# EAGLE board scoreboard (EAGLE 7.5.0)
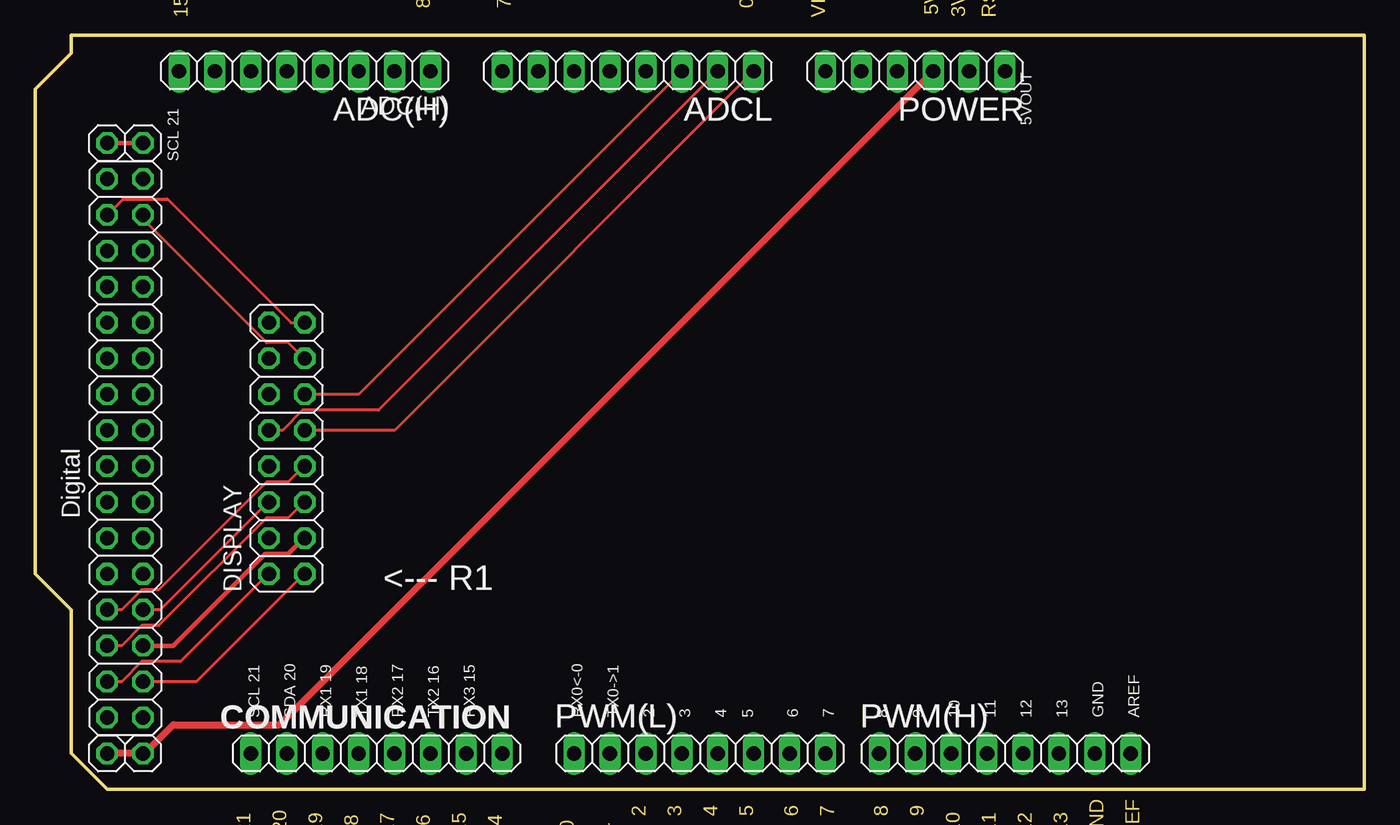
[diagram p0: board, top side]
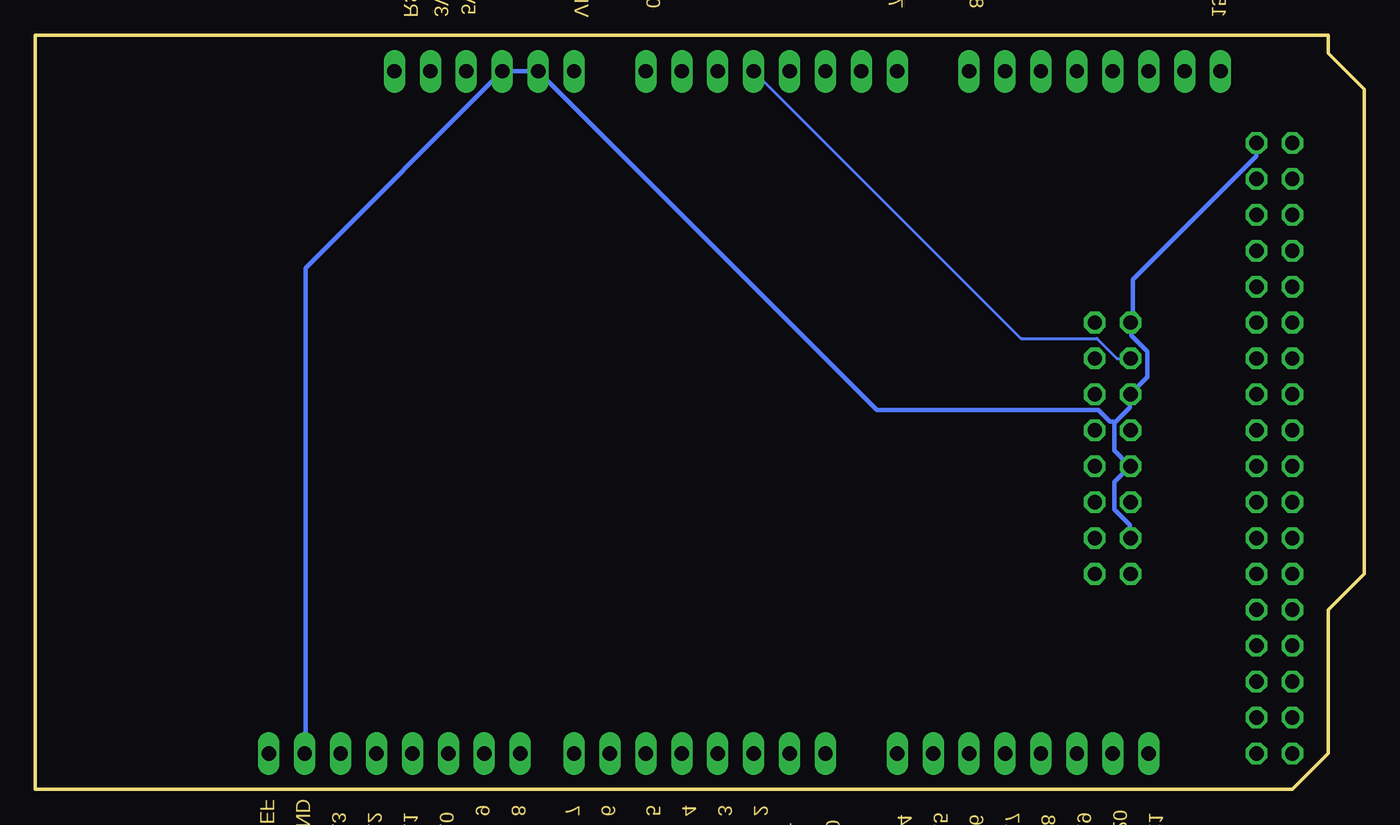
[diagram p1: board, bottom side, seen from below]

Size 93.98 x 53.34 mm. Coordinates in mm from the lower left corner, seen from the top.
Outline: 93.98,0 5.08,0 2.54,2.54 2.54,12.7 0,15.24 0,49.53 2.54,52.07 2.54,53.34 93.98,53.34 93.98,0
Copper layers (1*16): Top 0.0356mm / dielectric 1.5011mm / Bottom 0.0356mm
Design rules "oshpark-2layer": minimum track width 6mil, minimum drill 13mil, track to track 6mil, track to pad 6mil, pad to pad 6mil, via to via 6mil, smd to smd 6mil, copper to edge 15mil, drill to drill 6mil, minimum pad ring 7mil, minimum via ring 7mil, stop-mask expansion 2.5mil, vias tented up to drill 0mil, thermal gap 10mil
Net classes: 0 default: width 0.203 mm, drill 0.406 mm, clearance 0.203 mm; 1 power: width 0.61 mm, drill 0.711 mm, clearance 0.203 mm; 2 gnd: width 0.305 mm, drill 0.711 mm, clearance 0.203 mm; 3 usbvcc: width 0.508 mm, drill 0.711 mm, clearance 0.203 mm

## Footprints (pad centres in the part's own frame; a part is rotated, then mirrored left to right if it is on the bottom)
1X08 = drill 1.016 long: 1 -8.89,0; 2 -6.35,0; 3 -3.81,0; 4 -1.27,0; 5 1.27,0; 6 3.81,0; 7 6.35,0; 8 8.89,0
2X08 = drill 1.016 octagon: 1 -8.89,-1.27; 2 -8.89,1.27; 3 -6.35,-1.27; 4 -6.35,1.27; 5 -3.81,-1.27; 6 -3.81,1.27; 7 -1.27,-1.27; 8 -1.27,1.27; 9 1.27,-1.27; 10 1.27,1.27; 11 3.81,-1.27; 12 3.81,1.27; 13 6.35,-1.27; 14 6.35,1.27; 15 8.89,-1.27; 16 8.89,1.27
1X01 = drill 1.016 octagon: 1 0,0
1X06 = drill 1.016 long: 1 -6.35,0; 2 -3.81,0; 3 -1.27,0; 4 1.27,0; 5 3.81,0; 6 6.35,0

## Placement (x,y rotation side)
ADC(H)  [1X08]  19.05,50.8 180 top
ADCL  [1X08]  41.91,50.8 180 top
COMMUNICATION  [1X08]  24.13,2.54 0 top
DISPLAY  [2X08]  17.78,24.13 90 top
JP1  Digital  [2X08]  6.35,13.97 270 top
JP2  Digital  [2X08]  6.35,34.29 270 top
JP3  [1X01]  7.62,2.54 180 top
JP4  [1X01]  5.08,2.54 180 top
JP5  [1X01]  7.62,45.72 180 top
JP6  [1X01]  5.08,45.72 180 top
POWER  [1X06]  62.23,50.8 180 top
PWM(H)  [1X08]  68.58,2.54 0 top
PWM(L)  [1X08]  46.99,2.54 0 top

## Library data of the parts
ADC(H) ADCL COMMUNICATION DISPLAY JP1-JP6 POWER PWM(H) PWM(L) = pinhead

## Nets
+3V3 [power]: POWER.2
+5V [usbvcc]: JP3.1 JP4.1 POWER.3
ADC0: ADCL.1 DISPLAY.9
ADC1: ADCL.2 DISPLAY.10
ADC2: ADCL.3 DISPLAY.11
ADC3: ADCL.4 DISPLAY.14
ADC4: ADCL.5
ADC5: ADCL.6
ADC6: ADCL.7
ADC7: ADCL.8
ADC8: ADC(H).1
ADC9: ADC(H).2
ADC10: ADC(H).3
ADC11: ADC(H).4
ADC12: ADC(H).5
ADC13: ADC(H).6
ADC14: ADC(H).7
ADC15: ADC(H).8
AREF: PWM(H).8
DIG22: JP1.16
DIG23: JP1.15
DIG24: DISPLAY.1 JP1.14
DIG25: DISPLAY.2 JP1.13
DIG26 [gnd]: DISPLAY.3 JP1.12
DIG27: DISPLAY.5 JP1.11
DIG28: DISPLAY.6 JP1.10
DIG29: DISPLAY.7 JP1.9
DIG30: JP1.8
DIG31: JP1.7
DIG32: JP1.6
DIG33: JP1.5
DIG34: JP1.4
DIG35: JP1.3
DIG36: JP1.2
DIG37: JP1.1
DIG38: JP2.16
DIG39: JP2.15
DIG40: JP2.14
DIG41: JP2.13
DIG42: JP2.12
DIG43: JP2.11
DIG44: JP2.10
DIG45: JP2.9
DIG46: JP2.8
DIG47: JP2.7
DIG48: JP2.6
DIG49: JP2.5
DIG50: DISPLAY.13 JP2.4
DIG51: DISPLAY.15 JP2.3
DIG52: JP2.2
DIG53: JP2.1
GND [gnd]: DISPLAY.4 DISPLAY.8 DISPLAY.12 DISPLAY.16 JP5.1 JP6.1 POWER.4 POWER.5 PWM(H).7
PWM00: PWM(L).1
PWM01: PWM(L).2
PWM02: PWM(L).3
PWM03: PWM(L).4
PWM04: PWM(L).5
PWM05: PWM(L).6
PWM06: PWM(L).7
PWM07: PWM(L).8
PWM08: PWM(H).1
PWM09: PWM(H).2
PWM10: PWM(H).3
PWM11: PWM(H).4
PWM12: PWM(H).5
PWM13: PWM(H).6
RESET: POWER.1
RX1_D19: COMMUNICATION.3
RX2_D17: COMMUNICATION.5
RX3_D15: COMMUNICATION.7
RX4_D14: COMMUNICATION.8
SCL_D21: COMMUNICATION.1
SDA_D20: COMMUNICATION.2
TX1_D18: COMMUNICATION.4
TX2_D16: COMMUNICATION.6
VIN [power]: POWER.6

## Tracks (layer width: path | path; a pad name or v marks a point on that pad's centre or on a via)
+5V
  Top 0.508: JP4.1 JP3.1 7.82,2.64 9.75,4.57 17.27,4.57 POWER.3
ADC0
  Top 0.203: DISPLAY.9 25.4,25.4 ADCL.1
ADC1
  Top 0.203: DISPLAY.10 17.48,25.4 18.9,26.82 24.28,26.82 ADCL.2
ADC2
  Top 0.203: DISPLAY.11 22.86,27.94 ADCL.3
ADC3
  Bottom 0.203: DISPLAY.14 17.48,30.48 18.9,31.9 24.28,31.9 ADCL.4
DIG24
  Top 0.203: JP1.14 11.38,7.62 19,15.24 DISPLAY.1
DIG25
  Top 0.203: JP1.13 6.1,7.62 7.52,9.04 10.26,9.04 16.46,15.24 DISPLAY.2
DIG26
  Top 0.305: JP1.12 9.75,10.16 16.26,16.66 17.88,16.66 19,17.78 DISPLAY.3
DIG27
  Top 0.203: JP1.11 6.1,10.16 7.52,11.58 8.74,11.58 16.36,19.2 17.88,19.2 19,20.32 DISPLAY.5
DIG28
  Top 0.203: JP1.10 8.84,12.7 16.46,20.32 DISPLAY.6
DIG29
  Top 0.203: JP1.9 6.1,12.7 7.52,14.12 8.74,14.12 16.36,21.74 17.88,21.74 19,22.86 DISPLAY.7
DIG50
  Top 0.203: JP2.4 7.62,40.34 16.36,31.6 17.88,31.6 19,30.48 DISPLAY.13
DIG51
  Top 0.203: DISPLAY.15 18.09,33.02 9.35,41.76 6.2,41.76 JP2.3
GND
  Top 0.305: JP5.1 JP6.1
  Bottom 0.305: DISPLAY.4 16.56,17.78 16.56,18.69 17.68,19.81 17.68,21.74 16.56,22.86 DISPLAY.8 16.66,22.96 17.68,23.98 17.68,25.91 | 17.68,25.91 16.56,27.03 16.56,27.94 DISPLAY.12 16.46,28.04 15.34,29.16 15.34,30.99 16.46,32.11 16.46,33.02 DISPLAY.16 16.36,33.12 16.36,36.07 7.62,44.81 JP5.1 | PWM(H).7 74.88,2.54 74.88,36.88 POWER.4 POWER.5 34.44,26.82 18.8,26.82 17.98,26.01 17.78,26.01 17.68,25.91

## Text on the board
Dimension: 5V | 3V3 | 15 | 8 | 7 | 0 | VIN | RST | 2 | 3 | 4 | 5 | 6 | 7 | 8 | 9 | 10 | 11 | 12 | 13 | GND | AREF | SCL 21 | SDA 20 | RX1 19 | TX1 18 | RX2 17 | TX2 16 | RX3 15 | TX3 14 | RX 0 | TX 1 | Communication | PWM
tOrigins: Analog In | Power
tNames: 5VOUT | SCL 21 | <--- R1 | SCL 21 | SDA 20 | RX1 19 | TX1 18 | RX2 17 | TX2 16 | RX3 15 | RX0<-0 | TX0->1 | 2 | 3 | 4 | 5 | 6 | 7 | 8 | 9 | 10 | 11 | 12 | 13 | GND | AREF
IDFDebug: RussDaBus | Scoreboard | REV: 0000001
_tPlace: ADC(H) | ADCL | POWER | COMMUNICATION | PWM(L) | PWM(H)
_Reference: JP6 | JP5 | JP1 | JP4 | JP3